# Altium PCB STM_System_Board.PCBDOC (part 4 of 16)
Units mm, origin at the board's own origin, x right, y up, seen from the top; angles counter-clockwise.
Board outline 222.53 x 100.01 mm, 6 copper layers (Top Layer, Int1 (GND), Int2 (Sign), Layer 1, Layer 2, Bottom Layer), stack 1.526 mm thick; 702 components, 774 nets, 3596 pads, 1988 vias.
Unrouted connection lines stored in the file: 1.
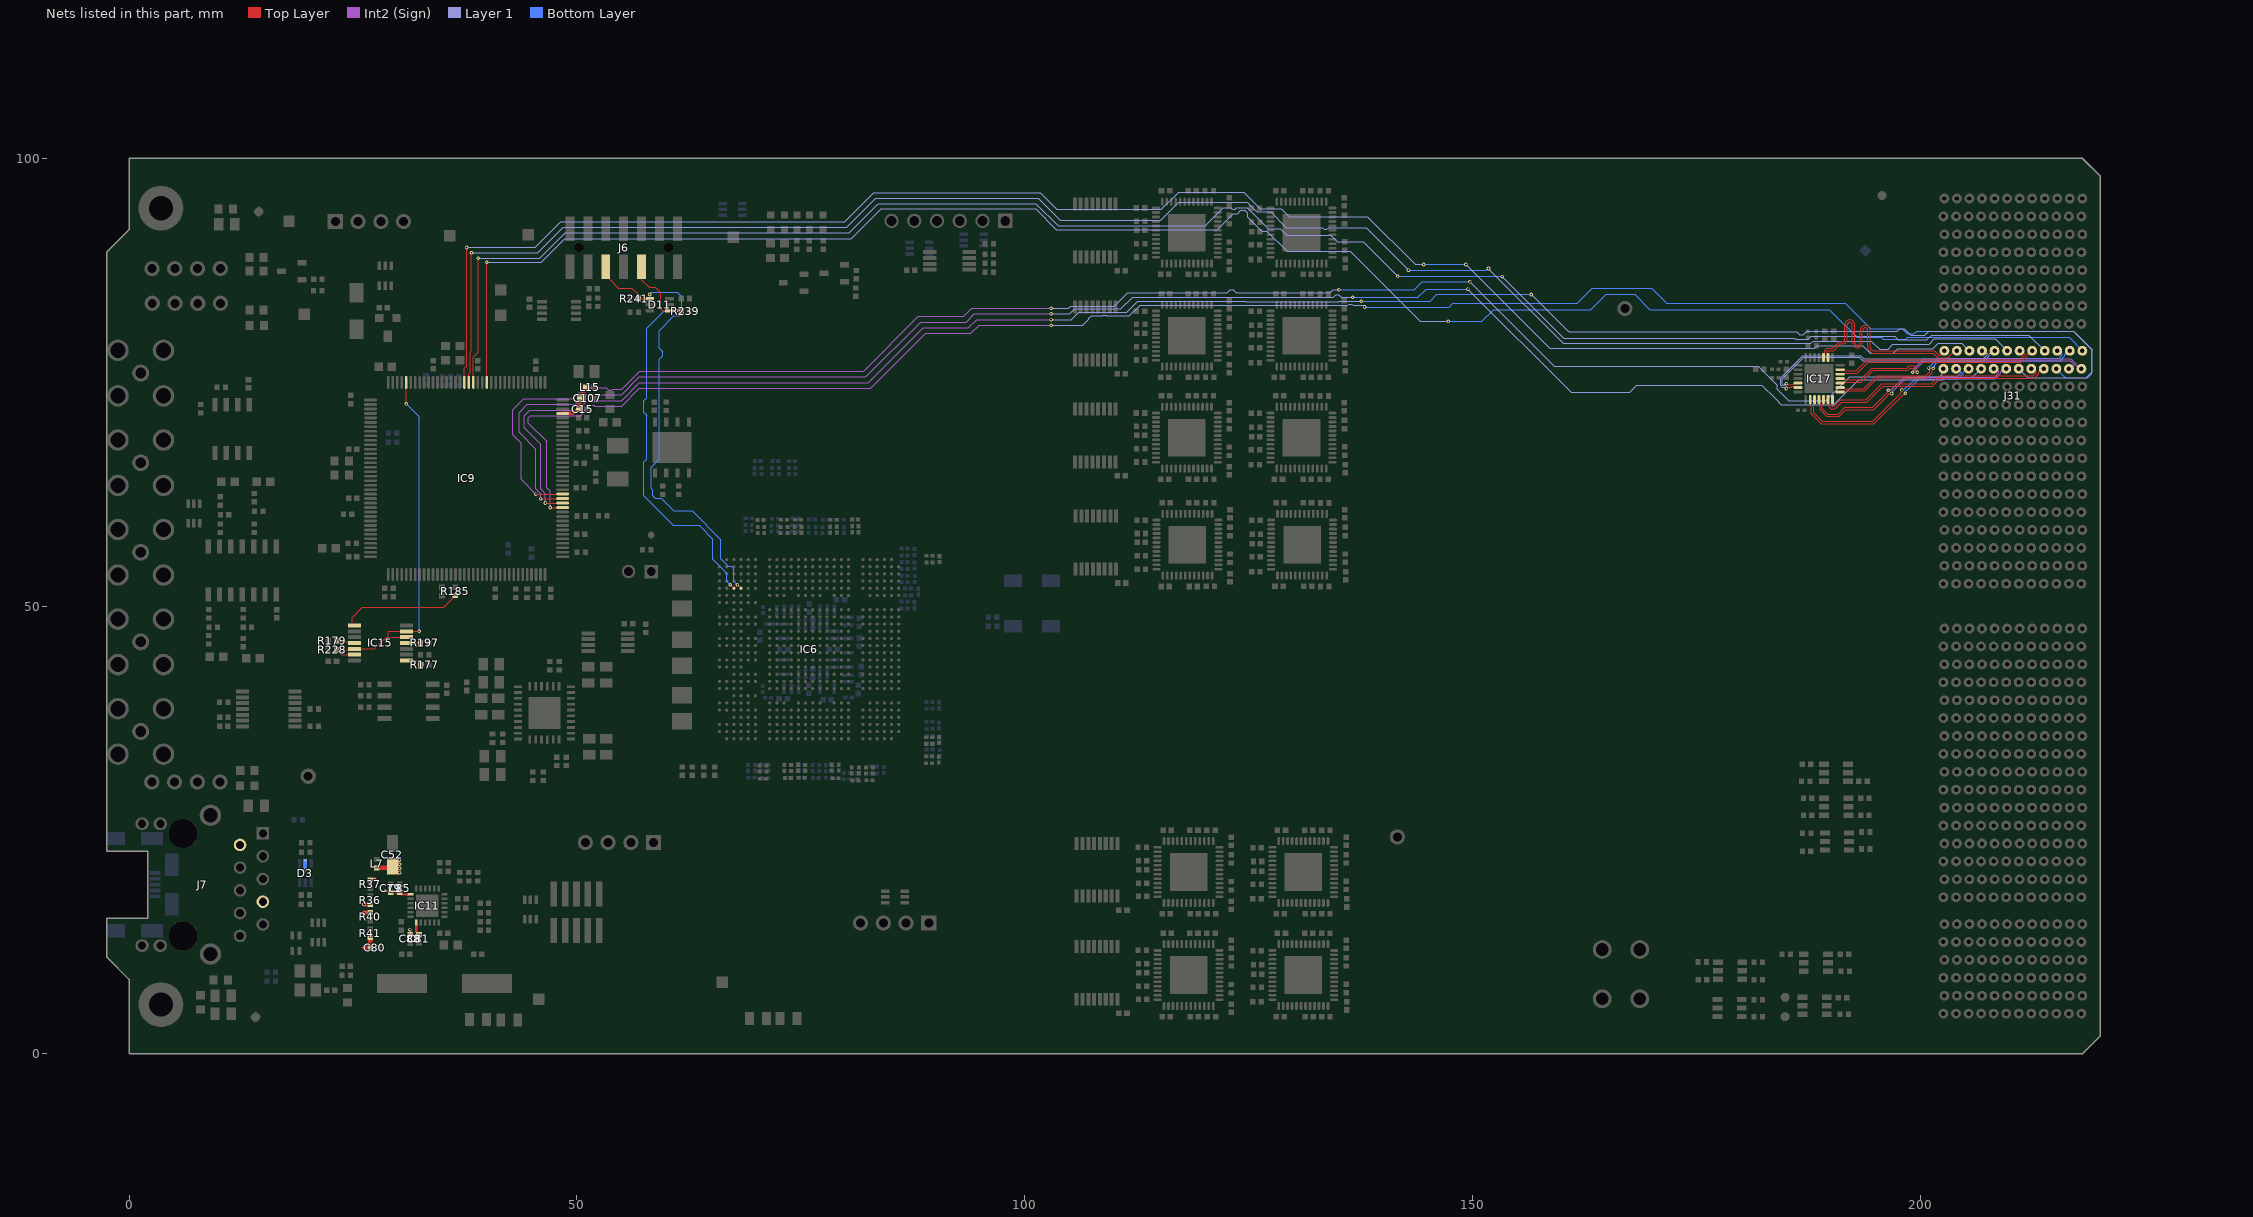
[diagram p7: the nets of this part, all layers, seen from the top]

## Part data (continued)
R3 R4 R135: library part R0603_0R_JUMPER, "Resistor", Case=0603, Manufacturer=GENERIC, Manufacturer1 ComponentHeight=0.55mm, Manufacturer1 Example="NIC COMPONENT", Manufacturer1 Part Number=NRC06Z0, Author="CERN DEM JLC", Component Type=Standard, CreateDate=03.12.2007, HelpURL=\\cern.ch\dfs\Applications\Altium\Datasheets\R0603_NIC_NRC.pdf, LatestRevisionDate=13.03.2008, Manufacturer Part Number=R0603_0R_JUMPER, Mounted=Yes, Part Description="1A (0.05R Max DC Resistance) Zero Ohm Jumper", Part Number=R0603_0R_JUMPER, Pin Count=2, PressFit=No, Sense=No, SMD=Yes, Socket=No, Status=Preferred
R5 R6 R7 R8 R9 R15 R17 R19 R92 R93 R201 R202: library part R0402_51R_1%_0.0625W_100PPM, "Resistor - 1%", Case=0402, Manufacturer=GENERIC, Manufacturer1 ComponentHeight=0.4mm, Manufacturer1 Example="YAGEO PHYCOMP", Manufacturer1 Part Number=232270675109L, Power=0.0625W, Tolerance=±1%, Author="CERN DEM JLC", Component Type=Standard, HelpURL=\\cern.ch\dfs\Applications\Altium\Datasheets\R0402_Phycomp_RC0402.pdf, Manufacturer Part Number=R0402_51R_1%_0.0625W_100PPM, Mounted=Yes, Part Description="General Purpose Thick Film Chip Resistor", Part Number=R0402_51R_1%_0.0625W_100PPM, Pin Count=2, PressFit=No, Sense=No, SMD=Yes, Socket=No, Status="Not Recommended", TC=±100ppm/°C
  R5 R6 R7 R17: CreateDate=03.12.2007, LatestRevisionDate=17.10.2012
  R8 R9 R15 R19 R92 R93 R201 R202: CreateDate=03/12/2007, LatestRevisionDate=17/10/2012
R10 R11 R12 R13 R16 R18 R20 R21 R30 R31 R33 R35 R42 R43 R44 R47 R55 R59 R75 R96 R99 R136 R194 R195 R198 R200 R203 R215 R216 R217 R228: library part R0402_10K_1%_0.0625W_100PPM, "Resistor - 1%", Case=0402, Manufacturer=GENERIC, Manufacturer1 ComponentHeight=0.4mm, Manufacturer1 Example="YAGEO PHYCOMP", Manufacturer1 Part Number=232270671003L, Power=0.0625W, Tolerance=±1%, Author="CERN DEM JLC", Component Type=Standard, HelpURL=\\cern.ch\dfs\Applications\Altium\Datasheets\R0402_Phycomp_RC0402.pdf, Manufacturer Part Number=R0402_10K_1%_0.0625W_100PPM, Mounted=Yes, Part Description="General Purpose Thick Film Chip Resistor", Part Number=R0402_10K_1%_0.0625W_100PPM, Pin Count=2, SMD=Yes, Socket=No, TC=±100ppm/°C
  R10 R11 R18 R20 R21 R59 R200 R203: CreateDate=03.12.2007, LatestRevisionDate=17.10.2012, Sense=No, Status="Not recommended"
  R12 R35 R215 R216: CreateDate=2007-12-03, LatestRevisionDate=2012-10-17, PressFit=No, Sense=No, Status="Not Recommended"
  R13 R42 R43 R44 R47 R55 R96 R99 R198: CreateDate=03/12/2007, LatestRevisionDate=17/10/2012, PressFit=No, Sense=No, Status="Not Recommended"
  R16 R30 R31 R33 R136 R228: CreateDate=2007-12-03, LatestRevisionDate=2012-10-17, Status="Not recommended", Table="Resistors SMD"
  R75 R194 R195 R217: CreateDate=03.12.2007, LatestRevisionDate=17.10.2012, PressFit=No, Sense=No, Status="Not Recommended"
R14 R97 R210 R211 R218 R219 R283 R284 R285 R286: library part R0402_0R_JUMPER, "Resistor", Case=0402, Manufacturer=GENERIC, Manufacturer1 ComponentHeight=0.4mm, Manufacturer1 Example="YAGEO PHYCOMP", Manufacturer1 Part Number=232270591001L, Author="CERN DEM JLC", Component Type=Standard, HelpURL=\\cern.ch\dfs\Applications\Altium\Datasheets\R0402_Phycomp_RC0402.pdf, Manufacturer Part Number=R0402_0R_JUMPER, Mounted=Yes, Part Description="1A (0.05R Max DC Resistance) Zero Ohm Jumper", Part Number=R0402_0R_JUMPER, Pin Count=2, Sense=No, SMD=Yes, Socket=No
  R14 R97 R284 R285 R286: CreateDate=03/12/2007, LatestRevisionDate=17/10/2012, PressFit=No, Status="Not Recommended"
  R210 R211 R283: CreateDate=03.12.2007, LatestRevisionDate=17.10.2012, PressFit=No, Status="Not Recommended"
  R218 R219: CreateDate=03.12.2007, LatestRevisionDate=17.10.2012, Status="Not recommended"
R22 R24 R26 R27 R28 R32 R38 R48 R51 R53 R56 R57 R61 R63 R65 R66 R67 R69 R71 R72 R74 R80 R82 R83 R84 R86 R88 R89 R90 R94 R101 R102 R103 R105 R107 R108 R109 R111 R113 R114 R115 R117 R119 R120 R121 R123 R129 R130 R133 R144 R145 R147 R148 R150 R151 R153 R154 R156 R157 R159 R160 R162 R163 R165 R247 R249 R250 R252 R253 R255 R256 R258 R259 R261 R273 R275 R276 R278 R279 R281: library part R0201_165R_1%_0.05W_200PPM, "Resistor - 1%", Case=0201, Manufacturer=GENERIC, Manufacturer1 ComponentHeight=0.27mm, Manufacturer1 Example=VISHAY, Manufacturer1 Part Number=CRCW0201165RFNED, Power=0.05W, Tolerance=±1%, Author="CERN DEM MR", Component Type=Standard, CreateDate=26.01.2016, HelpURL="\\cern.ch\dfs\Applications\Altium\Datasheets\R0201_VISHAY_CRCW e3.pdf", LatestRevisionDate=26.01.2016, Manufacturer Part Number=R0201_165R_1%_0.05W_200PPM, Mounted=Yes, Part Description="Thick Film Chip Resistor", Part Number=R0201_165R_1%_0.05W_200PPM, Pin Count=2, PressFit=No, Sense=No, SMD=Yes, Socket=No, Status="Not Recommended", TC=±200ppm/°C
R23 R25 R29 R34 R52 R54 R62 R64 R68 R70 R79 R81 R85 R87 R91 R100 R104 R106 R110 R112 R116 R118 R122 R124 R134 R146 R149 R152 R155 R158 R161 R164 R248 R251 R254 R257 R260 R274 R277 R280: library part R0201_140R_1%_0.05W_200PPM, "Resistor - 1%", Case=0201, Manufacturer=GENERIC, Manufacturer1 ComponentHeight=0.27mm, Manufacturer1 Example=VISHAY, Manufacturer1 Part Number=CRCW0201140RFNED, Power=0.05W, Tolerance=±1%, Author="CERN DEM MR", Component Type=Standard, CreateDate=26.01.2016, HelpURL="\\cern.ch\dfs\Applications\Altium\Datasheets\R0201_VISHAY_CRCW e3.pdf", LatestRevisionDate=26.01.2016, Manufacturer Part Number=R0201_140R_1%_0.05W_200PPM, Mounted=Yes, Part Description="Thick Film Chip Resistor", Part Number=R0201_140R_1%_0.05W_200PPM, Pin Count=2, PressFit=No, Sense=No, SMD=Yes, Socket=No, Status="Not Recommended", TC=±200ppm/°C
R36 R37 R40 R41 R128 R167A R167B R167C R167D R167E R167F R169A R169B R169C R169D R169E R169F R171A R171B R171C R171D R171E R171F R173A R173B R173C R173D R173E R173F R175A R175B R175C R175D R175E R175F R176 R177 R179 R184A R184B R184C R184D R184E R184F R185 R186 R187 R188 R189 R191A R191B R191C R191D R191E R191F R193A R193B R193C R193D R193E R193F R197 R245: library part R0402_49R9_1%_0.0625W_100PPM, "Resistor - 1%", Case=0402, Manufacturer=GENERIC, Manufacturer1 ComponentHeight=0.4mm, Manufacturer1 Example="YAGEO PHYCOMP", Manufacturer1 Part Number="232270674999L or RC0402FR-0749R9L", Power=0.0625W, Tolerance=±1%, Author="CERN DEM JLC", Component Type=Standard, HelpURL=\\cern.ch\dfs\Applications\Altium\Datasheets\R0402_Phycomp_RC0402.pdf, Manufacturer Part Number=R0402_49R9_1%_0.0625W_100PPM, Mounted=Yes, Part Description="General Purpose Thick Film Chip Resistor", Part Number=R0402_49R9_1%_0.0625W_100PPM, Pin Count=2, SMD=Yes, Socket=No, TC=±100ppm/°C
  R36 R37 R40 R41 R128 R176 R177 R179 R185 R186 R187 R188 R189 R197 R245: CreateDate=2012-10-24, LatestRevisionDate=2012-10-24, Status="Not recommended", Table="Resistors SMD"
  R167A R167B R167C R167D R167E R167F R169A R169B R169C R169D R169E R169F R171A R171B R171C R171D R171E R171F R173A R173B R173C R173D R173E R173F R175A R175B R175C R175D R175E R175F R184A R184B R184C R184D R184E R184F R191A R191B R191C R191D R191E R191F R193A R193B R193C R193D R193E R193F: CreateDate=24.10.2012, LatestRevisionDate=24.10.2012, PressFit=No, Sense=No, Status="Not Recommended"
R39 R212 R242: library part R0402_330R_1%_0.0625W_100PPM, "Resistor - 1%", Case=0402, Manufacturer=GENERIC, Manufacturer1 ComponentHeight=0.4mm, Manufacturer1 Example="YAGEO PHYCOMP", Manufacturer1 Part Number=232270673301L, Power=0.0625W, Tolerance=±1%, Author="CERN DEM JLC", Component Type=Standard, CreateDate=03.12.2007, HelpURL=\\cern.ch\dfs\Applications\Altium\Datasheets\R0402_Phycomp_RC0402.pdf, LatestRevisionDate=17.10.2012, Manufacturer Part Number=R0402_330R_1%_0.0625W_100PPM, Mounted=Yes, Part Description="General Purpose Thick Film Chip Resistor", Part Number=R0402_330R_1%_0.0625W_100PPM, Pin Count=2, PressFit=No, Sense=No, SMD=Yes, Socket=No, Status="Not Recommended", TC=±100ppm/°C
R45 R46 R50 R60: library part R0402_33R_1%_0.0625W_100PPM, "Resistor - 1%", Case=0402, Manufacturer=GENERIC, Manufacturer1 ComponentHeight=0.4mm, Manufacturer1 Example="YAGEO PHYCOMP", Manufacturer1 Part Number=232270673309L, Power=0.0625W, Tolerance=±1%, Author="CERN DEM JLC", Component Type=Standard, CreateDate=03/12/2007, HelpURL=\\cern.ch\dfs\Applications\Altium\Datasheets\R0402_Phycomp_RC0402.pdf, LatestRevisionDate=17/10/2012, Manufacturer Part Number=R0402_33R_1%_0.0625W_100PPM, Mounted=Yes, Part Description="General Purpose Thick Film Chip Resistor", Part Number=R0402_33R_1%_0.0625W_100PPM, Pin Count=2, PressFit=No, Sense=No, SMD=Yes, Socket=No, Status="Not Recommended", TC=±100ppm/°C
R49: library part R0402_12K1_1%_0.0625W_100PPM, "Resistor - 1%", Case=0402, Manufacturer=GENERIC, Manufacturer1 ComponentHeight=0.4mm, Manufacturer1 Example="YAGEO PHYCOMP", Manufacturer1 Part Number="232270671213L or RC0402FR-0712K1L", Power=0.0625W, Tolerance=±1%, Author="CERN DEM JLC", Component Type=Standard, CreateDate=24/10/2012, HelpURL=\\cern.ch\dfs\Applications\Altium\Datasheets\R0402_Phycomp_RC0402.pdf, LatestRevisionDate=24/10/2012, Manufacturer Part Number=R0402_12K1_1%_0.0625W_100PPM, Mounted=Yes, Part Description="General Purpose Thick Film Chip Resistor", Part Number=R0402_12K1_1%_0.0625W_100PPM, Pin Count=2, PressFit=No, Sense=No, SMD=Yes, Socket=No, Status="Not Recommended", TC=±100ppm/°C
R58 R76 R77 R78: library part R0603_220R_1%_0.1W_100PPM, "Resistor - 1%", Case=0603, Manufacturer=GENERIC, Manufacturer1 ComponentHeight=0.55mm, Manufacturer1 Example="NIC COMPONENT", Manufacturer1 Part Number=NRC06F2200TRF, Power=0.1W, Tolerance=±1%, Author="CERN DEM JLC", Component Type=Standard, CreateDate=03.12.2007, HelpURL=\\cern.ch\dfs\Applications\Altium\Datasheets\R0603_NIC_NRC.pdf, LatestRevisionDate=13.03.2008, Manufacturer Part Number=R0603_220R_1%_0.1W_100PPM, Mounted=Yes, Part Description="General Purpose Thick Film Chip Resistor", Part Number=R0603_220R_1%_0.1W_100PPM, Pin Count=2, Sense=No, SMD=Yes, Socket=No, Status=Preferred, TC=±100ppm/°C
R73: library part R0603_24K_1%_0.1W_100PPM, "Resistor - 1%", Case=0603, Manufacturer=GENERIC, Manufacturer1 ComponentHeight=0.55mm, Manufacturer1 Example="NIC COMPONENT", Manufacturer1 Part Number=NRC06F2402TRF, Power=0.1W, Tolerance=±1%, Author="CERN DEM JLC", Component Type=Standard, CreateDate=03.12.2007, HelpURL=\\cern.ch\dfs\Applications\Altium\Datasheets\R0603_NIC_NRC.pdf, LatestRevisionDate=13.03.2008, Manufacturer Part Number=R0603_24K_1%_0.1W_100PPM, Mounted=Yes, Part Description="General Purpose Thick Film Chip Resistor", Part Number=R0603_24K_1%_0.1W_100PPM, Pin Count=2, Sense=No, SMD=Yes, Socket=No, Status=Preferred, TC=±100ppm/°C
R95: library part R0603_30R_1%_0.1W_100PPM, "Resistor - 1%", Case=0603, Manufacturer=GENERIC, Manufacturer1 ComponentHeight=0.55mm, Manufacturer1 Example="NIC COMPONENT", Manufacturer1 Part Number=NRC06F30R0TRF, Power=0.1W, Tolerance=±1%, Author="CERN DEM JLC", Component Type=Standard, CreateDate=03.12.2007, HelpURL=\\cern.ch\dfs\Applications\Altium\Datasheets\R0603_NIC_NRC.pdf, LatestRevisionDate=13.03.2008, Manufacturer Part Number=R0603_30R_1%_0.1W_100PPM, Mounted=Yes, Part Description="General Purpose Thick Film Chip Resistor", Part Number=R0603_30R_1%_0.1W_100PPM, Pin Count=2, PressFit=No, Sense=No, SMD=Yes, Socket=No, Status=Preferred, TC=±100ppm/°C
R98 R230 R235 R243 R246: library part R0402_1K5_1%_0.0625W_100PPM, "Resistor - 1%", Case=0402, Manufacturer=GENERIC, Manufacturer1 ComponentHeight=0.4mm, Manufacturer1 Example="YAGEO PHYCOMP", Manufacturer1 Part Number=232270671502L, Power=0.0625W, Tolerance=±1%, Author="CERN DEM JLC", Component Type=Standard, HelpURL=\\cern.ch\dfs\Applications\Altium\Datasheets\R0402_Phycomp_RC0402.pdf, Manufacturer Part Number=R0402_1K5_1%_0.0625W_100PPM, Mounted=Yes, Part Description="General Purpose Thick Film Chip Resistor", Part Number=R0402_1K5_1%_0.0625W_100PPM, Pin Count=2, PressFit=No, Sense=No, SMD=Yes, Socket=No, Status="Not Recommended", TC=±100ppm/°C
  R98: CreateDate=03/12/2007, LatestRevisionDate=17/10/2012
  R230 R235 R243 R246: CreateDate=03.12.2007, LatestRevisionDate=17.10.2012
R125 R126 R127 R137 R138 R139 R140 R141 R142 R143 R204 R205 R262 R263 R264 R265 R266 R267 R268 R269 R270 R271 R272: library part R0402_22R_1%_0.0625W_100PPM, "Resistor - 1%", Case=0402, Manufacturer=GENERIC, Manufacturer1 ComponentHeight=0.4mm, Manufacturer1 Example="YAGEO PHYCOMP", Manufacturer1 Part Number=232270672209L, Power=0.0625W, Tolerance=±1%, Author="CERN DEM JLC", Component Type=Standard, CreateDate=03.12.2007, HelpURL=\\cern.ch\dfs\Applications\Altium\Datasheets\R0402_Phycomp_RC0402.pdf, LatestRevisionDate=17.10.2012, Manufacturer Part Number=R0402_22R_1%_0.0625W_100PPM, Mounted=Yes, Part Description="General Purpose Thick Film Chip Resistor", Part Number=R0402_22R_1%_0.0625W_100PPM, Pin Count=2, PressFit=No, Sense=No, SMD=Yes, Socket=No, Status="Not Recommended", TC=±100ppm/°C
R166A R166B R166C R166D R166E R166F R168A R168B R168C R168D R168E R168F R170A R170B R170C R170D R170E R170F R172A R172B R172C R172D R172E R172F R174A R174B R174C R174D R174E R174F R178A R178B R178C R178D R178E R178F R190A R190B R190C R190D R190E R190F R192A R192B R192C R192D R192E R192F: library part R0402_100R_1%_0.1W_100PPM, "Resistor - 1%", Case=0402, Manufacturer=GENERIC, Manufacturer1 ComponentHeight=0.4mm, Manufacturer1 Example=PANASONIC, Manufacturer1 Part Number=ERJ2RKF1000X, Manufacturer Part Number=R0402_100R_1%_0.1W_100PPM_50V, Power=0.1W, Tolerance=±1%, Voltage=50V, Author="CERN DEM JLC", Component Type=Standard, CreateDate=12.12.2013, HelpURL=\\cern.ch\dfs\Applications\Altium\Datasheets\R0402_PANASONIC_ERJ2RK.pdf, LatestRevisionDate=03.03.2015, Mounted=Yes, Part Description="General Purpose Thick Film Chip Resistor", Part Number=R0402_100R_1%_0.1W_100PPM, Pin Count=2, Sense=No, SMD=Yes, Socket=No, Status="Not recommended", TC=±100ppm/°C
R180 R181 R182 R183 R196 R236: library part R0603_1K_1%_0.1W_100PPM, "Resistor - 1%", Case=0603, Manufacturer=GENERIC, Manufacturer1 ComponentHeight=0.55mm, Manufacturer1 Example="NIC COMPONENT", Manufacturer1 Part Number=NRC06F1001TRF, Power=0.1W, Tolerance=±1%, Author="CERN DEM JLC", Component Type=Standard, HelpURL=\\cern.ch\dfs\Applications\Altium\Datasheets\R0603_NIC_NRC.pdf, Manufacturer Part Number=R0603_1K_1%_0.1W_100PPM, Mounted=Yes, Part Description="General Purpose Thick Film Chip Resistor", Part Number=R0603_1K_1%_0.1W_100PPM, Pin Count=2, PressFit=No, Sense=No, SMD=Yes, Socket=No, Status=Preferred, TC=±100ppm/°C
  R180 R181 R182 R183: CreateDate=03/12/2007, LatestRevisionDate=13/03/2008
  R196 R236: CreateDate=03.12.2007, LatestRevisionDate=13.03.2008
R199 R220 R221 R222: library part R0402_10R_1%_0.0625W_200PPM, "Resistor - 1%", Case=0402, Manufacturer=GENERIC, Manufacturer1 ComponentHeight=0.4mm, Manufacturer1 Example="YAGEO PHYCOMP", Manufacturer1 Part Number=232270671009L, Power=0.0625W, Tolerance=±1%, Author="CERN DEM JLC", Component Type=Standard, CreateDate=24.06.2009, HelpURL=\\cern.ch\dfs\Applications\Altium\Datasheets\R0402_Phycomp_RC0402.pdf, LatestRevisionDate=17.10.2012, Manufacturer Part Number=R0402_10R_1%_0.0625W_200PPM, Mounted=Yes, Part Description="General Purpose Thick Film Chip Resistor", Part Number=R0402_10R_1%_0.0625W_200PPM, Pin Count=2, PressFit=No, Sense=No, SMD=Yes, Socket=No, Status="Not Recommended", TC=±200ppm/°C
R206 R209: library part R0603_1K2_1%_0.1W_100PPM, "Resistor - 1%", Case=0603, Manufacturer=GENERIC, Manufacturer1 ComponentHeight=0.55mm, Manufacturer1 Example="NIC COMPONENT", Manufacturer1 Part Number=NRC06F1201TRF, Power=0.1W, Tolerance=±1%, Author="CERN DEM JLC", Component Type=Standard, CreateDate=03.12.2007, HelpURL=\\cern.ch\dfs\Applications\Altium\Datasheets\R0603_NIC_NRC.pdf, LatestRevisionDate=13.03.2008, Manufacturer Part Number=R0603_1K2_1%_0.1W_100PPM, Mounted=Yes, Part Description="General Purpose Thick Film Chip Resistor", Part Number=R0603_1K2_1%_0.1W_100PPM, Pin Count=2, Sense=No, SMD=Yes, Socket=No, Status=Preferred, TC=±100ppm/°C
R207 R208 R213 R214: library part R0402_10k_1%_0.0625W_100PPM, "Resistor - 1%", Case=0402, Manufacturer=GENERIC, Manufacturer1 ComponentHeight=0.4mm, Manufacturer1 Example="YAGEO PHYCOMP", Manufacturer1 Part Number=232270671003L, Manufacturer Part Number=R0402_10K_1%_0.0625W_100PPM, Power=0.0625W, Tolerance=±1%, Author="CERN DEM JLC", Component Type=Standard, CreateDate=03.12.2007, HelpURL=\\cern.ch\dfs\Applications\Altium\Datasheets\R0402_Phycomp_RC0402.pdf, LatestRevisionDate=17.10.2012, Mounted=Yes, Part Description="General Purpose Thick Film Chip Resistor", Part Number=R0402_10K_1%_0.0625W_100PPM, Pin Count=2, PressFit=No, Sense=No, SMD=Yes, Socket=No, Status="Not Recommended", TC=±100ppm/°C
R223 R224 R225 R227 R229 R239 R240 R241 R244: library part R0402_4k7_1%_0.0625W_100PPM, "Resistor - 1%", Case=0402, Manufacturer=GENERIC, Manufacturer1 ComponentHeight=0.4mm, Manufacturer1 Example="YAGEO PHYCOMP", Manufacturer1 Part Number=232270674702L, Manufacturer Part Number=R0402_4K7_1%_0.0625W_100PPM, Power=0.0625W, Tolerance=±1%, Author="CERN DEM JLC", Component Type=Standard, CreateDate=03.12.2007, HelpURL=\\cern.ch\dfs\Applications\Altium\Datasheets\R0402_Phycomp_RC0402.pdf, LatestRevisionDate=17.10.2012, Mounted=Yes, Part Description="General Purpose Thick Film Chip Resistor", Part Number=R0402_4K7_1%_0.0625W_100PPM, Pin Count=2, PressFit=No, Sense=No, SMD=Yes, Socket=No, Status="Not Recommended", TC=±100ppm/°C
R226: library part R0402_1k_1%_0.0625W_100PPM, "Resistor - 1%", Case=0402, Manufacturer=GENERIC, Manufacturer1 ComponentHeight=0.4mm, Manufacturer1 Example="YAGEO PHYCOMP", Manufacturer1 Part Number=232270671002L, Manufacturer Part Number=R0402_1K_1%_0.0625W_100PPM, Power=0.0625W, Tolerance=±1%, Author="CERN DEM JLC", Component Type=Standard, CreateDate=03.12.2007, HelpURL=\\cern.ch\dfs\Applications\Altium\Datasheets\R0402_Phycomp_RC0402.pdf, LatestRevisionDate=17.10.2012, Mounted=Yes, Part Description="General Purpose Thick Film Chip Resistor", Part Number=R0402_1K_1%_0.0625W_100PPM, Pin Count=2, PressFit=No, Sense=No, SMD=Yes, Socket=No, Status="Not Recommended", TC=±100ppm/°C
R231: library part R0402_1K8_1%_0.0625W_100PPM, "Resistor - 1%", Case=0402, Manufacturer=GENERIC, Manufacturer1 ComponentHeight=0.4mm, Manufacturer1 Example="YAGEO PHYCOMP", Manufacturer1 Part Number=232270671802L, Power=0.0625W, Tolerance=±1%, Author="CERN DEM JLC", Component Type=Standard, CreateDate=03.12.2007, HelpURL=\\cern.ch\dfs\Applications\Altium\Datasheets\R0402_Phycomp_RC0402.pdf, LatestRevisionDate=17.10.2012, Manufacturer Part Number=R0402_1K8_1%_0.0625W_100PPM, Mounted=Yes, Part Description="General Purpose Thick Film Chip Resistor", Part Number=R0402_1K8_1%_0.0625W_100PPM, Pin Count=2, PressFit=No, Sense=No, SMD=Yes, Socket=No, Status="Not Recommended", TC=±100ppm/°C
R232: library part R0402_5K1_1%_0.0625W_100PPM, "Resistor - 1%", Case=0402, Manufacturer=GENERIC, Manufacturer1 ComponentHeight=0.4mm, Manufacturer1 Example="YAGEO PHYCOMP", Manufacturer1 Part Number=232270675102L, Power=0.0625W, Tolerance=±1%, Author="CERN DEM JLC", Component Type=Standard, CreateDate=03.12.2007, HelpURL=\\cern.ch\dfs\Applications\Altium\Datasheets\R0402_Phycomp_RC0402.pdf, LatestRevisionDate=17.10.2012, Manufacturer Part Number=R0402_5K1_1%_0.0625W_100PPM, Mounted=Yes, Part Description="General Purpose Thick Film Chip Resistor", Part Number=R0402_5K1_1%_0.0625W_100PPM, Pin Count=2, PressFit=No, Sense=No, SMD=Yes, Socket=No, Status="Not Recommended", TC=±100ppm/°C
R233: library part R0402_1K6_1%_0.0625W_100PPM, "Resistor - 1%", Case=0402, Manufacturer=GENERIC, Manufacturer1 ComponentHeight=0.4mm, Manufacturer1 Example="YAGEO PHYCOMP", Manufacturer1 Part Number=232270671602L, Power=0.0625W, Tolerance=±1%, Author="CERN DEM JLC", Component Type=Standard, CreateDate=03.12.2007, HelpURL=\\cern.ch\dfs\Applications\Altium\Datasheets\R0402_Phycomp_RC0402.pdf, LatestRevisionDate=17.10.2012, Manufacturer Part Number=R0402_1K6_1%_0.0625W_100PPM, Mounted=Yes, Part Description="General Purpose Thick Film Chip Resistor", Part Number=R0402_1K6_1%_0.0625W_100PPM, Pin Count=2, PressFit=No, Sense=No, SMD=Yes, Socket=No, Status="Not Recommended", TC=±100ppm/°C
R234: library part R0402_6K8_1%_0.0625W_100PPM, "Resistor - 1%", Case=0402, Manufacturer=GENERIC, Manufacturer1 ComponentHeight=0.4mm, Manufacturer1 Example="YAGEO PHYCOMP", Manufacturer1 Part Number=232270676802L, Power=0.0625W, Tolerance=±1%, Author="CERN DEM JLC", Component Type=Standard, CreateDate=03.12.2007, HelpURL=\\cern.ch\dfs\Applications\Altium\Datasheets\R0402_Phycomp_RC0402.pdf, LatestRevisionDate=17.10.2012, Manufacturer Part Number=R0402_6K8_1%_0.0625W_100PPM, Mounted=Yes, Part Description="General Purpose Thick Film Chip Resistor", Part Number=R0402_6K8_1%_0.0625W_100PPM, Pin Count=2, PressFit=No, Sense=No, SMD=Yes, Socket=No, Status="Not Recommended", TC=±100ppm/°C
R237: library part R0402_470R_1%_0.0625W_100PPM, "Resistor - 1%", Case=0402, Manufacturer=GENERIC, Manufacturer1 ComponentHeight=0.4mm, Manufacturer1 Example="YAGEO PHYCOMP", Manufacturer1 Part Number=232270674701L, Power=0.0625W, Tolerance=±1%, Author="CERN DEM JLC", Component Type=Standard, CreateDate=03.12.2007, HelpURL=\\cern.ch\dfs\Applications\Altium\Datasheets\R0402_Phycomp_RC0402.pdf, LatestRevisionDate=17.10.2012, Manufacturer Part Number=R0402_470R_1%_0.0625W_100PPM, Mounted=Yes, Part Description="General Purpose Thick Film Chip Resistor", Part Number=R0402_470R_1%_0.0625W_100PPM, Pin Count=2, PressFit=No, Sense=No, SMD=Yes, Socket=No, Status="Not Recommended", TC=±100ppm/°C
R238: library part R0402_820R_1%_0.0625W_100PPM, "Resistor - 1%", Case=0402, Manufacturer=GENERIC, Manufacturer1 ComponentHeight=0.4mm, Manufacturer1 Example="YAGEO PHYCOMP", Manufacturer1 Part Number=232270678201L, Power=0.0625W, Tolerance=±1%, Author="CERN DEM JLC", Component Type=Standard, CreateDate=03.12.2007, HelpURL=\\cern.ch\dfs\Applications\Altium\Datasheets\R0402_Phycomp_RC0402.pdf, LatestRevisionDate=17.10.2012, Manufacturer Part Number=R0402_820R_1%_0.0625W_100PPM, Mounted=Yes, Part Description="General Purpose Thick Film Chip Resistor", Part Number=R0402_820R_1%_0.0625W_100PPM, Pin Count=2, PressFit=No, Sense=No, SMD=Yes, Socket=No, Status="Not Recommended", TC=±100ppm/°C
R282: library part R0402_200K_1%_0.0625W_100PPM, "Resistor - 1%", Case=0402, Manufacturer=GENERIC, Manufacturer1 ComponentHeight=0.4mm, Manufacturer1 Example="YAGEO PHYCOMP", Manufacturer1 Part Number=232270672004L, Power=0.0625W, Tolerance=±1%, Author="CERN DEM JLC", Component Type=Standard, CreateDate=03.12.2007, HelpURL=\\cern.ch\dfs\Applications\Altium\Datasheets\R0402_Phycomp_RC0402.pdf, LatestRevisionDate=17.10.2012, Manufacturer Part Number=R0402_200K_1%_0.0625W_100PPM, Mounted=Yes, Part Description="General Purpose Thick Film Chip Resistor", Part Number=R0402_200K_1%_0.0625W_100PPM, Pin Count=2, PressFit=No, Sense=No, SMD=Yes, Socket=No, Status="Not Recommended", TC=±100ppm/°C
R287 R288 R289 R290: library part "R0805_4M7_1%_0.125W_100PPM_VISHAY_CRCW e3", "Resistor - 1%", Case=0805, Manufacturer=VISHAY, Manufacturer Part Number=CRCW08054M70FKEA, Power=0.125W, Tolerance=±1%, Author="CERN DEM BR", Component Type=Standard, ComponentHeight=0.5mm, CreateDate=27/05/2019, HelpURL="\\cern.ch\dfs\Applications\Altium\Datasheets\R0805_VISHAY_CRCW e3.pdf", LatestRevisionDate=27/05/2019, Mounted=Yes, Part Description="150V, Standard Thick Film Chip Resistor", Part Number="R0805_4M7_1%_0.125W_100PPM_VISHAY_CRCW e3", Pin Count=2, PressFit=No, Sense=No, SMD=Yes, Socket=No, Status=None, TC=±100ppm/°C
R300: library part R0402_4K7_1%_0.0625W_100PPM, "Resistor - 1%", Case=0402, Manufacturer=GENERIC, Manufacturer1 ComponentHeight=0.4mm, Manufacturer1 Example="YAGEO PHYCOMP", Manufacturer1 Part Number=232270674702L, Power=0.0625W, Tolerance=±1%, Author="CERN DEM JLC", Component Type=Standard, CreateDate=03-Dec-07, HelpURL=\\cern.ch\dfs\Applications\Altium\Datasheets\R0402_Phycomp_RC0402.pdf, LatestRevisionDate=17-Oct-12, Manufacturer Part Number=R0402_4K7_1%_0.0625W_100PPM, Mounted=Yes, Part Description="General Purpose Thick Film Chip Resistor", Part Number=R0402_4K7_1%_0.0625W_100PPM, Pin Count=2, PressFit=No, Sense=No, SMD=Yes, Socket=No, Status="Not Recommended", TC=±100ppm/°C
ST2: "Schroff 3HP 4U EUROCARD Panel", Manufacturer=Schroff, Manufacturer Part Number=20818-017, Manufacturer Part Number 2=20848-664
T1 T2 T3: "N-CHANNEL MOSFET WITH DIODE", Case=SOT23-3, Manufacturer=NEXPERIA, Author="CERN DEM JLC", Bonding=No, Component Type=Standard, ComponentHeight=1.1mm, CreateDate=16.03.2010, Device=BSH103, HelpURL=\\cern.ch\dfs\Applications\Altium\Datasheets\BSH103.pdf, LatestRevisionDate=20.06.2017, Manufacturer Part Number=BSH103, Mounted=Yes, PackageDescription="SOT23, 3 pin, Pitch 0.95mm - 1.3mm W X 2.9mm L X 1.1mm H, IPC Medium Density", Part Description="30V 850mA N-Channel Enhancement Mode Field-Effect Transistor", Part Number=BSH103, Pin Count=3, PressFit=No, Sense=No, SMD=Yes, Socket=No
TP1 TP2 TP3 TP4 TP5 TP6 TP7 TP8 TP9: library part SMD_PAD_1.27X1.27MM, Author="CERN DEM JLC", Component Type="Standard (No BOM)", ComponentHeight=0mm, CreateDate=12.01.2008, Family="Test Point", HelpURL=Undefined, LatestRevisionDate=12.01.2008, Mounted=No, PackageDescription="1.27mm x 1.27mm PCB Copper Area (SMD Test Point)", Part Description="1.27mm x 1.27mm PCB Copper Area (SMD Test Point)", Part Number=SMD_PAD_1.27X1.27MM, Pin Count=1, Sense=No, SMD=Yes, Socket=No, Status=None

## Free pads (board coordinates)
  round 3.5 on Mech9: 1(-2.4,-9.9) 1(222.615,-9.9)
  round 2 on Mech9: 1(7.6,-9.9) 1(212.615,-9.9) 1(212.615,109.9)
  round 0.8 on Mech9: 1(9.5,0) 1(9.5,99.99) 1(10.75,0) 1(10.75,99.99) 1(12,0) 1(12,99.99) 1(13.25,0) 1(13.25,99.99) 1(14.5,0) 1(14.5,99.99) 1(64.5,0) 1(64.5,100) 1(65.75,0) 1(65.75,100) 1(67,0) 1(67,100) 1(68.25,0) 1(68.25,100) 1(69.5,0) 1(69.5,100) 1(119.5,0) 1(119.5,100) 1(120.75,0) 1(120.75,100) 1(122,0) 1(122,100) 1(123.25,0) 1(123.25,100) 1(124.5,0) 1(124.5,100) 1(174.5,0) 1(174.5,100) 1(175.75,0) 1(175.75,100) 1(177,0) 1(177,100) 1(178.25,0) 1(178.25,100) 1(179.5,0) 1(179.5,100)

## Via types
v1: diameter 0.4, hole 0.2, Top Layer to Bottom Layer, tented both sides, 1806 vias
v2: diameter 0.7, hole 0.4, Top Layer to Bottom Layer, tented both sides, 92 vias
v3: diameter 0.7, hole 0.4, Top Layer to Bottom Layer, 90 vias

## Nets (pads, with @x,y where several pads share a name; then routed paths per layer and width w, separated by ;. In a path a pad name is that pad's centre, name@x,y a point inside that pad or via, vN(x,y) a via of type N, cw(c..) or ccw(c..) an arc to the next point about the centre after c; other vN are vias at no path point)
1_PE_CLK_N: IC17.25 J31.B5 | length 29.3
  Top Layer w0.095: IC17.25@191,75.389 191.417,75.389 191.533,75.273 193.27,75.273 194.566,76.568 195.619,76.568 195.62,76.567 198.443,76.567 198.698,76.822 199.283,76.822 199.495,76.61 199.495,76.308 199.625,76.178 v1(199.625,76.1)
  Int2 (Sign) w0.102: v1(199.625,76.1) 199.625,76.152 199.468,76.309 199.468,76.442 200.413,77.386 216.672,77.386 217.132,76.926 217.132,76.842 216.78,76.49 J31.B5@216.539,76.49
1_PE_CLK_P: IC17.24 J31.A5 | length 29.6
  Top Layer w0.095: IC17.24@191,74.889 191.417,74.889 191.533,75.006 193.381,75.006 194.676,76.301 195.508,76.301 195.51,76.3 198.554,76.3 198.809,76.555 199.172,76.555 199.228,76.5 199.228,76.308 199.098,76.178 v1(199.098,76.1)
  Int2 (Sign) w0.102: v1(199.098,76.1) 199.098,76.152 199.255,76.309 199.255,76.53 200.324,77.6 216.761,77.6 217.346,77.015 217.346,76.842 217.698,76.49 J31.A5@217.939,76.49
1_SERVMOD_N: IC9.12 J31.C5 | length 203.7
  Top Layer w0.127: v1(47.025,61) 47.029,60.996 IC9.12@48.41,60.996
  Int2 (Sign) w0.127: v1(47.025,61) 47.025,62.798 46.6,63.223 46.6,68.4 44.575,70.425 44.575,71 44.825,71.25 50.356,71.25 51.497,72.391 51.887,72.391 51.977,72.3 54.975,72.3 56.979,74.304 82.785,74.304 88.906,80.425 93.956,80.425 94.881,81.35 v1(102.925,81.35)
  Layer 1 w0.127: v1(102.925,81.35) 106.45,81.35 106.9,81.8 106.925,81.8 107.138,82.013 107.138,82.116 107.443,82.421 108.719,82.421 108.738,82.441 109.062,82.441 109.102,82.4 111.675,82.4 112.85,83.575 136.058,83.575 136.185,83.702 136.509,83.702 136.636,83.575 137.725,83.575 v1(137.925,83.375)
  Bottom Layer w0.127: v1(137.925,83.375) 147.35,83.375 147.775,83.8 161.65,83.8 163.35,85.5 169.95,85.5 171.65,83.8 191.575,83.8 194.437,80.938 197.964,80.938 198.521,80.381 199.215,80.381 199.535,80.7 217.025,80.7 219.1,78.625 219.1,75.95 218.65,75.5 216.129,75.5 J31.C5@215.139,76.49
2_PE_CLK_N: IC17.21 J31.E5 | length 26
  Top Layer w0.095: IC17.21@190.15,73.039 190.15,72.623 190.033,72.506 190.033,72.372 190.089,72.316 190.35,72.316 191.073,73.039 193.887,73.039 195.673,74.825 201.175,74.825 202.042,75.692 212.565,75.692 212.905,76.032 212.905,76.111 212.526,76.49 J31.E5@212.339,76.49
2_PE_CLK_P: IC17.20 J31.D5 | length 26.8
  Top Layer w0.095: IC17.20@189.65,73.039 189.65,72.623 189.767,72.506 189.767,72.261 189.979,72.049 190.46,72.049 191.184,72.772 193.997,72.772 195.783,74.558 201.286,74.558 202.152,75.425 212.676,75.425 213.172,75.921 213.172,76.111 213.552,76.49 J31.D5@213.739,76.49
2_SERVMOD_N: IC9.13 J31.F5 | length 208.1
  Top Layer w0.127: v1(46.479,61.496) IC9.13@48.41,61.496
  Int2 (Sign) w0.127: v1(46.479,61.496) 46.479,62.546 45.95,63.075 45.95,68.075 44.1,69.925 44.1,71.225 44.725,71.85 50.078,71.85 51.149,72.921 54.975,72.921 56.979,74.925 82.528,74.925 88.649,81.046 93.699,81.046 94.624,81.971 v1(102.925,81.971)
  Layer 1 w0.127: v1(102.925,81.971) 105.171,81.971 106,82.8 111.35,82.8 112.575,84.025 124.65,84.025 124.715,83.96 135.036,83.96 135.101,84.025 v1(137.55,84.025) ; v1(156.525,84.775) 160.7,80.6 164.35,80.6 186.15,80.6 186.476,80.274 186.912,80.274 187.288,80.65 197.352,80.65 197.641,80.938 198.162,80.938 198.875,80.225 200.475,80.225 200.9,80.65 217.075,80.65 219.125,78.6 219.125,76.15 218.475,75.5 211.929,75.5 J31.F5@210.939,76.49
  Bottom Layer w0.127: v1(137.55,84.025) 145.25,84.025 146,84.775 v1(156.525,84.775)
3_PE_CLK_N: IC17.19 J31.H5 | length 23.9
  Top Layer w0.095: IC17.19@189.15,73.039 189.15,72.623 189.033,72.506 189.033,72.017 189.625,71.425 190.8,71.425 191.542,72.167 194.651,72.167 195.942,73.458 195.942,73.478 196.322,73.858 196.322,74.042 v1(196.377,74.098)
  Int2 (Sign) w0.102: v1(196.377,74.098) 196.418,74.138 196.73,74.138 198.155,75.564 208.242,75.564 208.732,76.054 208.732,76.138 208.38,76.49 J31.H5@208.139,76.49
3_PE_CLK_P: IC17.18 J31.G5 | length 24.7
  Top Layer w0.095: IC17.18@188.65,73.039 188.65,72.623 188.767,72.506 188.767,71.906 189.514,71.158 190.911,71.158 191.652,71.9 194.761,71.9 196.209,73.348 196.209,73.368 196.511,73.67 196.695,73.67 v1(196.75,73.725)
  Int2 (Sign) w0.102: v1(196.75,73.725) 196.75,73.806 196.951,74.007 196.951,74.057 198.244,75.35 208.331,75.35 208.946,75.965 208.946,76.138 209.298,76.49 J31.G5@209.539,76.49
3_SERVMOD_N: IC9.14 J31.I5 | length 189.8
  Top Layer w0.127: v1(45.954,61.996) IC9.14@48.41,61.996
  Int2 (Sign) w0.127: v1(45.954,61.996) 45.954,62.516 45.4,63.07 45.4,67.525 43.55,69.375 43.55,71.6 44.45,72.5 49.809,72.5 50.88,73.571 54.975,73.571 56.979,75.575 82.259,75.575 88.38,81.696 93.43,81.696 94.355,82.621 v1(102.925,82.621)
  Layer 1 w0.127: v1(102.925,82.621) 105.021,82.621 105.575,83.175 110.725,83.175 112.025,84.475 134.447,84.475 134.712,84.741 135.036,84.741 135.301,84.475 v1(136.6,84.475) ; v1(149.45,85.375) 160.975,73.85 167.525,73.85 168.325,74.65 182.269,74.65 183.747,73.172 184.452,72.466 190.291,72.466 193.1,75.275 202.475,75.275 202.725,75.525 205.774,75.525 J31.I5@206.739,76.49
  Bottom Layer w0.127: v1(136.6,84.475) 143.875,84.475 144.775,85.375 v1(149.45,85.375)
4_PE_CLK_N: IC17.17 J31.K5 | length 21.6
  Top Layer w0.095: IC17.17@188.15,73.039 188.15,72.623 188.033,72.506 188.033,71.592 189.025,70.6 194.65,70.6 197.844,73.794 197.844,74.064 v1(197.902,74.123)
  Bottom Layer w0.095: v1(197.902,74.123) 197.958,74.178 198.142,74.178 198.315,74.351 198.401,74.351 199.65,75.6 201.83,75.6 201.846,75.617 204.09,75.617 204.505,76.032 204.505,76.111 204.126,76.49 J31.K5@203.939,76.49
4_PE_CLK_P: IC17.16 J31.J5 | length 22.4
  Top Layer w0.095: IC17.16@187.65,73.039 187.65,72.623 187.767,72.506 187.767,71.481 188.914,70.333 194.761,70.333 197.913,73.485 198.01,73.485 v1(198.275,73.75)
  Bottom Layer w0.095: v1(198.275,73.75) 198.33,73.805 198.33,73.989 198.425,74.084 198.511,74.084 199.761,75.334 201.941,75.334 201.957,75.35 204.201,75.35 204.772,75.921 204.772,76.111 205.152,76.49 J31.J5@205.339,76.49
4_SERVMOD_N: IC9.15 J31.L5 | length 187.1
  Top Layer w0.127: v1(45.421,62.496) IC9.15@48.41,62.496
  Int2 (Sign) w0.127: v1(45.421,62.496) 43.775,64.143 43.775,68.175 42.825,69.125 42.825,71.9 44.05,73.125 49.55,73.125 50.791,74.366 53.257,74.366 53.538,74.085 53.862,74.085 53.962,74.184 54.975,74.184 56.991,76.2 82,76.2 88.121,82.321 93.171,82.321 94.096,83.246 v1(102.925,83.246)
  Layer 1 w0.127: v1(102.925,83.246) 104.896,83.246 105.1,83.45 109.975,83.45 111.475,84.95 122.574,84.95 122.927,85.303 123.25,85.303 123.603,84.95 134.075,84.95 134.425,85.3 v1(135.05,85.3) ; v1(149.675,86.175) 151.49,84.36 151.515,84.36 159.1,76.775 164.5,76.775 181.841,76.775 183.975,74.641 183.975,74.225 185.275,72.925 189.375,72.925 192.05,75.6 201.498,75.6 201.513,75.584 202.11,75.584 202.38,75.855 202.38,76.331 J31.L5@202.539,76.49
  Bottom Layer w0.127: v1(135.05,85.3) 143.475,85.3 144.35,86.175 v1(149.675,86.175)
5_PE_CLK_N: IC17.23 J31.C6 | length 27.7
  Top Layer w0.095: IC17.23@191,74.389 191.417,74.389 191.533,74.273 193.645,74.273 195.098,75.725 200.583,75.725 201.008,76.15 201.008,76.355 200.874,76.489 v1(200.874,76.563)
  Bottom Layer w0.095: v1(200.874,76.563) 200.874,76.602 201.94,77.667 215.44,77.667 215.805,78.032 215.805,78.111 215.426,78.49 J31.C6@215.239,78.49
5_PE_CLK_P: IC17.22 J31.B6 | length 28
  Top Layer w0.095: IC17.22@191,73.889 191.417,73.889 191.533,74.006 193.756,74.006 195.208,75.458 200.694,75.458 201.275,76.039 201.275,76.317 201.4,76.442 v1(201.4,76.525)
  Bottom Layer w0.095: v1(201.4,76.525) 201.4,76.608 201.563,76.771 201.563,76.913 202.05,77.4 215.551,77.4 216.072,77.921 216.072,78.111 216.452,78.49 J31.B6@216.639,78.49
5_SERVMOD_N: IC9.50 J31.A6 | length 205.2
  Top Layer w0.127: v1(39.925,88.375) 39.935,88.365 IC9.50@39.935,74.971
  Layer 1 w0.127: v1(39.925,88.375) 46.033,88.375 48.633,90.975 80.625,90.975 83.975,94.325 101.2,94.325 103.525,92 121.475,92 123.275,93.8 123.388,93.8 ; 123.388,93.801 123.751,93.801 124.115,94.165 124.56,94.165 124.875,93.85 124.875,93.4 126.425,91.85 127.025,91.85 129.275,89.6 136.3,89.6 144.125,81.775 v1(147.25,81.775)
  Bottom Layer w0.127: v1(147.25,81.775) 151.025,81.775 152.325,83.075 163.175,83.075 164.875,84.775 168.075,84.775 169.775,83.075 169.95,83.075 189.8,83.075 192.9,79.975 195.652,79.975 195.843,79.785 198.337,79.785 198.527,79.975 216.554,79.975 J31.A6@218.039,78.49
6_PE_CLK_N: IC17.27 J31.F6 | length 22.2
  Top Layer w0.095: IC17.27@191,76.389 191.417,76.389 191.533,76.273 192.795,76.273 194.023,77.5 211.073,77.5 211.605,78.032 211.605,78.111 211.226,78.49 J31.F6@211.039,78.49
6_PE_CLK_P: IC17.26 J31.E6 | length 22.6
  Top Layer w0.095: IC17.26@191,75.889 191.417,75.889 191.533,76.006 192.906,76.006 194.133,77.233 211.184,77.233 211.872,77.921 211.872,78.111 212.252,78.49 J31.E6@212.439,78.49
6_SERVMOD_N: IC9.53 J31.D6 | length 200.8
  Top Layer w0.127: IC9.53@38.435,74.971 38.435,76.105 ; 38.435,76.106 38.435,77.784 38.975,78.324 v1(38.975,88.825)
  Layer 1 w0.127: v1(38.975,88.825) 45.847,88.825 48.697,91.675 80.372,91.675 83.622,94.925 101.236,94.925 103.711,92.45 120.129,92.45 122.129,94.45 123.006,94.45 123.14,94.316 123.464,94.316 123.598,94.45 124.825,94.45 127.171,92.104 128.496,92.104 129.225,91.375 134.15,91.375 134.85,90.675 137.775,90.675 141.625,86.825 v1(141.625,86.8) ; v1(153.275,86.775) 160.15,79.9 164.2,79.9 185.925,79.9 186.05,79.775 187.425,79.775 187.75,80.1 197.075,80.1 197.475,79.7 200.675,79.7 201.225,80.25 212.079,80.25 J31.D6@213.839,78.49
  Bottom Layer w0.127: v1(141.625,86.8) 153.25,86.8 v1(153.275,86.775)
7_PE_CLK_N: IC17.13 J31.I6 | length 28.4
  Top Layer w0.095: v1(185,74.28) 185.078,74.28 185.208,74.41 185.536,74.41 185.632,74.506 185.767,74.506 185.883,74.389 IC17.13@186.3,74.389
  Layer 1 w0.102: v1@185.052,74.28 v1(185,74.28) 184.948,74.28 184.791,74.436 184.57,74.436 184.349,74.657 184.349,75.476 186.836,77.964 193.239,77.964 193.514,77.689 193.589,77.614 206.992,77.614 207.432,78.054 207.432,78.138 207.08,78.49 J31.I6@206.839,78.49
7_PE_CLK_P: IC17.12 J31.H6 | length 28
  Top Layer w0.095: v1(185,74.807) 185.078,74.807 185.208,74.676 185.426,74.676 185.522,74.773 185.767,74.773 185.883,74.889 IC17.12@186.3,74.889
  Layer 1 w0.102: v1@185.052,74.807 v1(185,74.807) 184.948,74.807 184.791,74.65 184.658,74.65 184.563,74.746 184.563,75.388 186.925,77.75 193.15,77.75 193.425,77.475 193.5,77.4 207.081,77.4 207.646,77.965 207.646,78.138 207.998,78.49 J31.H6@208.239,78.49
7_SERVMOD_N: IC9.54 J31.G6 | length 198.7
  Top Layer w0.127: IC9.54@37.935,74.971 37.935,75.91 38.075,76.05 38.075,78.3 38.225,78.45 v1(38.225,89.425)
  Layer 1 w0.127: v1(38.225,89.425) 45.599,89.425 48.449,92.275 80.124,92.275 83.374,95.525 101.485,95.525 103.96,93.05 115.15,93.05 117.2,95.1 124.8,95.1 125.878,94.022 126.606,94.022 126.628,94 127.431,94 129.185,92.246 133.183,92.246 133.39,92.039 133.713,92.039 133.92,92.246 138.079,92.246 v1(142.825,87.5) ; v1(151.75,87.675) 160.1,79.325 163.925,79.325 187.725,79.325 187.975,79.575 194.5,79.575 195.4,78.675 196.35,78.675 196.9,79.225 200.925,79.225 201.525,79.825 208.304,79.825 J31.G6@209.639,78.49
  Bottom Layer w0.127: v1(142.825,87.5) 151.501,87.5 151.676,87.675 v1(151.75,87.675)
8_PE_CLK_N: IC17.3 J31.L6 | length 23.8
  Top Layer w0.095: IC17.3@189.15,77.739 189.15,78.156 189.267,78.272 189.267,78.517 189.518,78.768 190.179,78.768 190.928,79.517 191.05,79.517 191.231,79.517 ccw(c191.231,79.81) 191.524,79.81 191.524,81.37 cw(c192.085,81.37) 192.645,81.37 192.645,79.398 ccw(c192.938,79.398) 193.232,79.398 193.232,80.762 cw(c193.792,80.762) 194.353,80.762 194.353,78.946 ccw(c194.646,78.946) 194.438,78.739 194.687,78.49 196.375,78.49 197.425,78.49 201.525,78.49 202.026,77.989 202.239,77.989 202.639,78.388 J31.L6@202.639,78.49
8_PE_CLK_P: IC17.2 J31.K6 | length 24.9
  Top Layer w0.095: IC17.2@189.65,77.739 189.65,78.156 189.533,78.272 189.533,78.407 189.628,78.502 190.207,78.502 190.29,78.502 191.038,79.25 191.05,79.25 191.231,79.25 ccw(c191.231,79.81) 191.791,79.81 191.791,81.37 cw(c192.085,81.37) 192.378,81.37 192.378,79.398 ccw(c192.938,79.398) 193.499,79.398 193.499,80.762 cw(c193.792,80.762) 194.086,80.762 194.086,78.946 ccw(c194.646,78.946) 194.25,78.55 194.577,78.223 196.375,78.223 196.46,78.223 201.415,78.223 201.916,77.722 203.038,77.722 203.806,78.49 J31.K6@204.039,78.49
8_SERVMOD_N: IC9.55 J31.J6 | length 195.5
  Top Layer w0.127: IC9.55@37.435,74.971 37.435,76.535 37.681,76.781 37.681,90.019 v1(37.675,90.025)
  Layer 1 w0.127: v1(37.675,90.025) 45.35,90.025 48.2,92.875 79.875,92.875 83.125,96.125 101.733,96.125 103.563,94.295 115.242,94.295 117.147,96.2 124.425,96.2 126.275,94.35 128.61,94.35 129.51,93.45 138.225,93.45 143.55,88.125 v1(144.525,88.125) ; v1(149.225,88.125) 158.6,78.75 164.7,78.75 188.1,78.75 188.425,79.075 193.525,79.075 194.375,78.225 196.925,78.225 197.425,78.725 201.325,78.725 201.95,79.35 204.579,79.35 J31.J6@205.439,78.49
  Bottom Layer w0.127: v1(144.525,88.125) v1(149.225,88.125)
AVDD: C15.1 C107.2 IC9.33 L15.2 | length 4.8
  Top Layer w0.381: IC9.33@48.41,71.496 49.602,71.496 49.936,71.831 50.056,71.831 C15.1@50.175,71.95
  Top Layer w0.508: C15.1@50.175,71.95 50.254,72.029 50.254,72.954 C107.2@50.475,73.175 ; C107.2@50.605,73.045 50.702,73.143 50.702,74.152 50.965,74.415 L15.2@50.965,74.425
AVDDT_PHY: C52.1 C79.1 C80.2 C81.2 C85.2 C88.2 D3.5 IC11.1 IC11.19 J7.4 J7.9 L7.1 R36.2 R37.2 R40.1 R41.1 | length 14.3
  Top Layer w0.254: v1(28.591,18.221) 28.619,18.194 29.054,18.194 C79.1@29.197,18.051 C85.2@30.233,18.051 30.473,17.811 IC11.19@31.403,17.811 ; v1(31.354,13.876) 31.369,13.862 31.369,13.301 C88.2@31.383,13.287 31.385,13.289 32.364,13.289 C81.2@32.366,13.291 32.053,13.604 IC11.1@32.053,14.661
  Top Layer w0.381: C52.1@29.676,21.636 v1(30.172,21.636) ; C52.1@29.69,20.24 v1(30.187,20.24) ; C52.1@29.694,21.176 v1(30.19,21.176) ; C52.1@29.708,20.703 v1(30.205,20.703)
  Top Layer w0.508: v1(26.23,15.781) R40.1@26.909,15.781 ; v1(26.23,16.691) R36.2@26.909,16.691 ; v1(26.255,11.865) C80.2@26.959,11.865 26.934,11.89 26.934,12.977 R41.1@26.909,13.002 ; R37.2@26.909,19.426 v1(27.424,19.426) ; L7.1@27.66,20.79 29.229,20.79 C52.1@29.394,20.956
  Bottom Layer w0.381: v1(19.685,20.574) D3.5@19.685,21.295
CFG_FLASH_MISO: IC15.8 R185.1 | length 13.6
  Top Layer w0.127: IC15.8@25.166,47.826 25.054,47.826 24.892,47.988 24.892,48.705 26.04,49.853 35.109,49.853 36.415,51.159 R185.1@36.435,51.159
CFG_FLASH_MOSI: IC15.4 R197.1 | length 1.6
  Top Layer w0.127: IC15.4@30.966,45.876 R197.1@32.526,45.876
CFG_FLASH_SCLK: IC15.1 R177.1 | length 1.8
  Top Layer w0.127: IC15.1@30.966,43.926 32.054,43.926 32.309,43.672 32.329,43.672 32.555,43.445 R177.1@32.555,43.425 R177.1@32.555,43.405
CFG_FLASH_SSEL: IC15.11 R179.1 | length 2.1
  Top Layer w0.127: R179.1@23.179,46.13 23.908,46.13 24.001,46.038 25.004,46.038 IC15.11@25.166,45.876
CFG_FLASH_UP_EN: IC9.68 IC15.5 IC15.6 IC15.12 IC15.13 R228.1 | length 43
  Top Layer w0.127: IC15.13@25.166,44.576 23.717,44.576 23.425,44.867 23.405,44.867 23.179,45.094 R228.1@23.179,45.114 25.054,45.114 IC15.12@25.166,45.226 27.393,45.226 28.693,46.526 28.935,46.526 ; v1(30.947,72.558) 30.936,72.569 IC9.68@30.936,74.97 ; IC15.5@30.966,46.526 28.935,46.526 ; v1(32.376,47.183) 30.973,47.183 IC15.6@30.966,47.176 29.01,47.176 28.935,47.102 28.935,46.526 ; IC9.68@30.935,74.971 IC9.68@30.936,74.97
  Bottom Layer w0.127: v1(30.947,72.558) 32.394,71.111 32.394,47.202 v1(32.376,47.183)
CFG_TCK: D11.1 IC6.AD5 J6.6 R239.2 | length 47.8
  Top Layer w0.127: J6.6@57.213,87.882 57.259,87.837 57.259,86.391 58.075,85.575 58.75,85.575 59.375,84.95 59.375,83.119 59.512,82.982 D11.1@60.329,82.982 60.38,82.931 v1(61.087,82.931) R239.2@61.633,82.931 ; v1(67.115,52.384) IC6.AD5@67.515,51.984
  Bottom Layer w0.127: v1(61.087,82.931) 59.706,82.931 57.785,81.01 57.785,73.24 57.711,73.166 57.693,73.166 57.435,72.907 57.435,71.643 57.693,71.385 57.711,71.385 57.785,71.31 57.785,66.41 57.475,66.1 57.475,62.3 60.775,59 63.625,59 65.175,57.45 65.175,55.2 66.705,53.67 66.705,52.793 v1(67.115,52.384)
CFG_TDI: D11.4 IC6.AC5 J6.10 R241.1 | length 52.1
  Top Layer w0.127: J6.10@53.213,87.882 53.65,87.446 53.65,86.451 54.629,85.471 56.134,85.471 56.769,84.836 56.769,84.417 R241.1@56.858,84.328 58.083,84.328 D11.4@58.129,84.282 v1(58.129,84.771) ; v1(67.915,52.384) IC6.AC5@68.315,51.984
  Bottom Layer w0.127: v1(58.129,84.771) 58.358,85 61.2,85 61.675,84.525 61.675,82.65 61.4,82.375 60.807,82.375 59.182,80.75 59.182,78.782 59.566,78.399 59.566,77.951 59.182,77.568 59.182,66.382 58.3,65.5 58.3,63.125 58.488,62.937 58.488,62.302 58.746,62.044 59.381,62.044 60.8,60.625 62.85,60.625 66.075,57.4 66.075,55.25 66.9,54.425 67.226,54.425 67.524,54.127 67.524,52.774 v1(67.915,52.384)